# Altium PCB DC2342A-4-LAYOUT-ASCII.PcbDoc (part 1 of 2)
Units mm, origin at the board's own origin, x right, y up, seen from the top; angles counter-clockwise.
Board outline 88.9 x 88.9 mm, 4 copper layers (Comp Side, Layer 2, Layer 3, Solder Side), stack 0.831 mm thick; 86 components, 36 nets, 203 pads, 245 vias.
Unrouted connection lines stored in the file: 89.
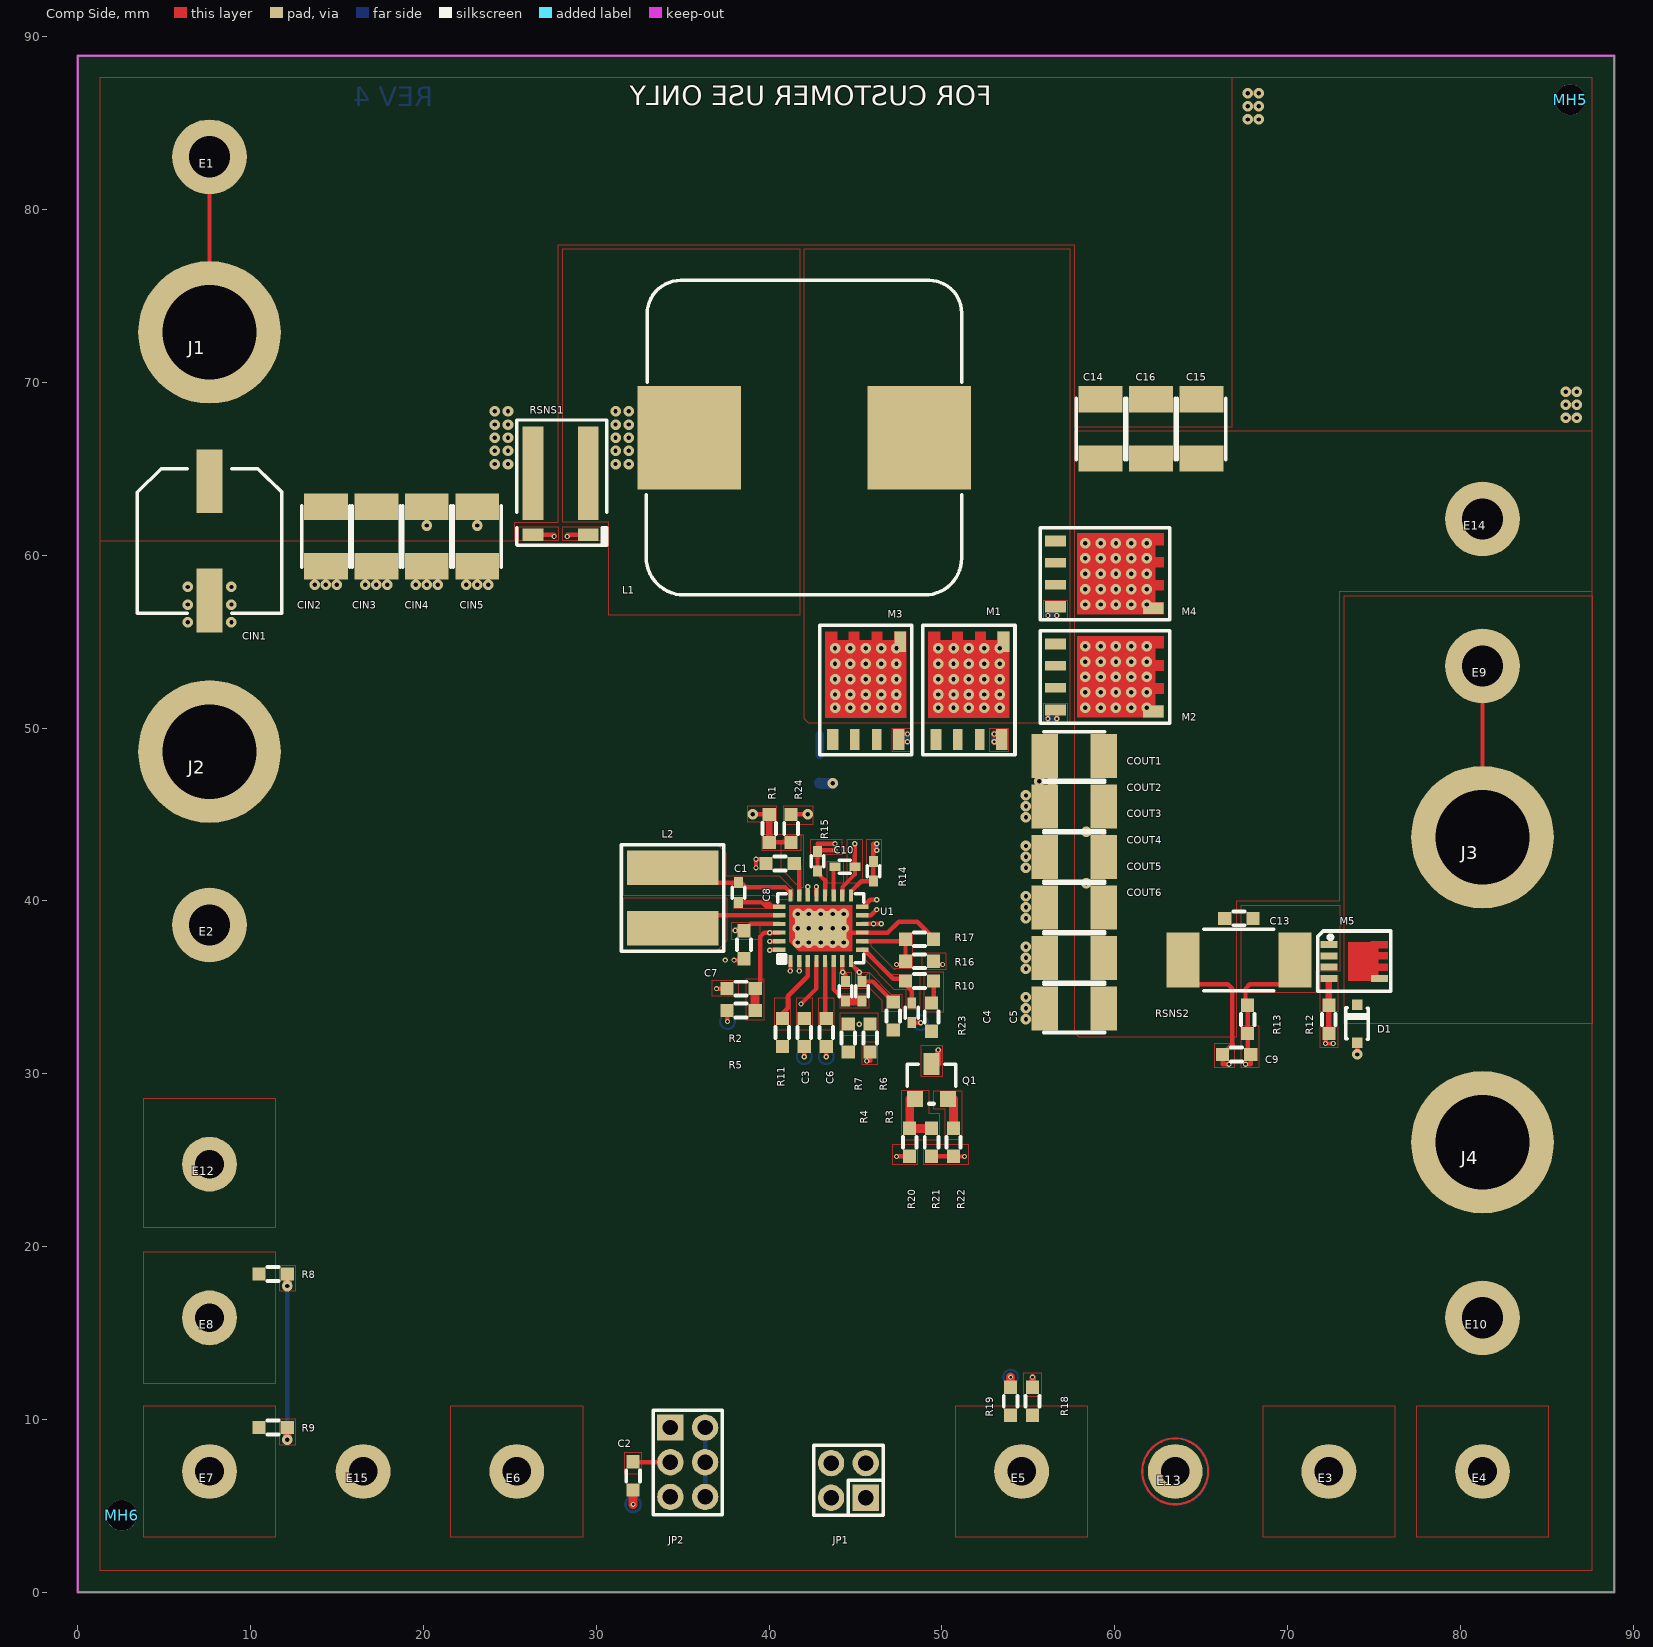
[diagram p0: Comp Side view]
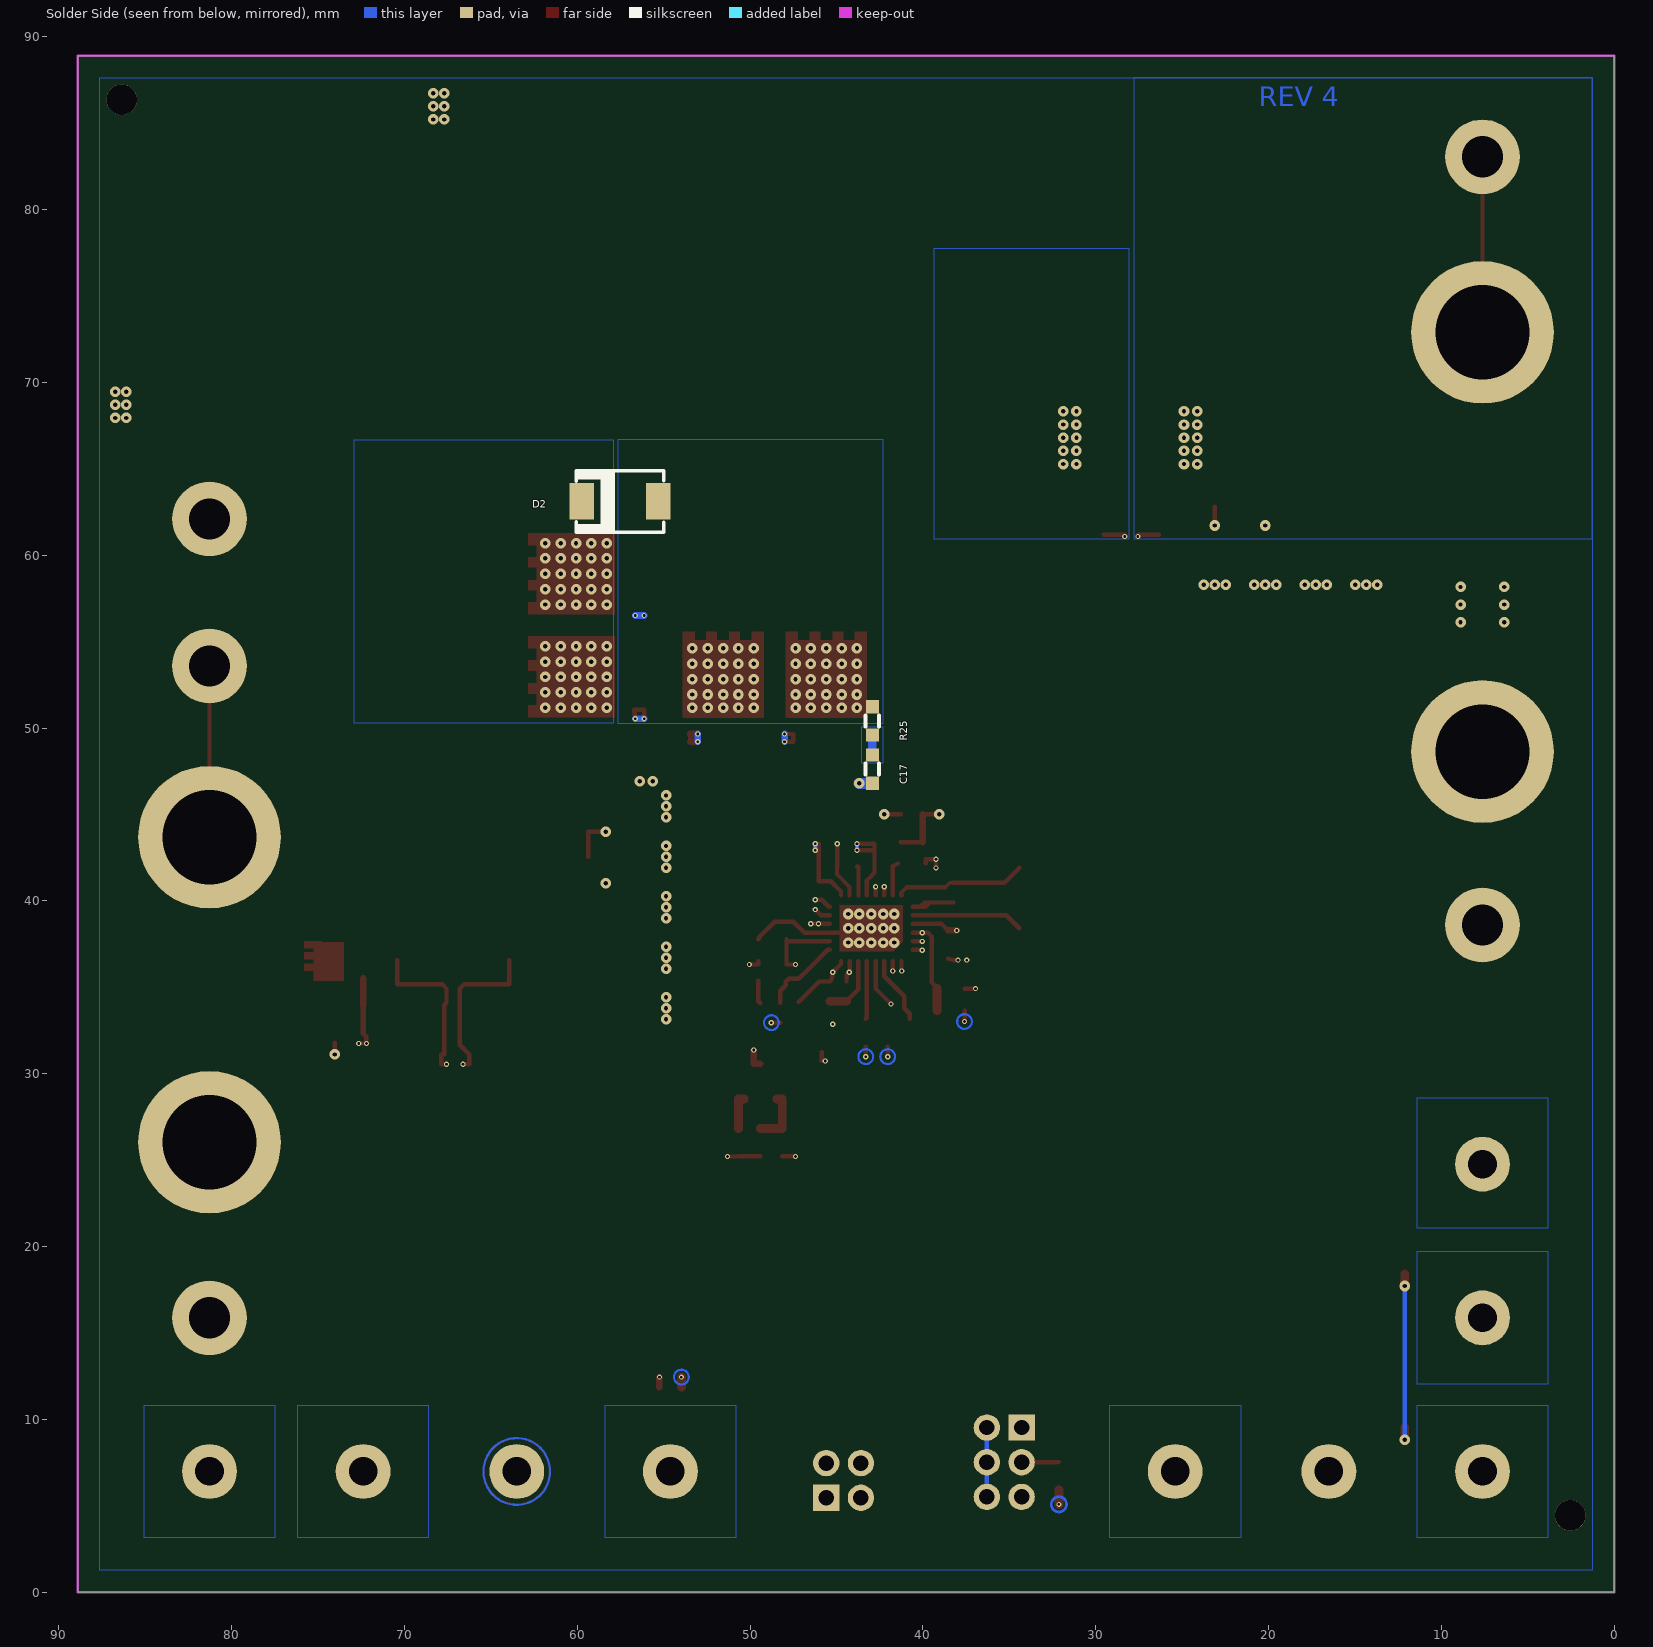
[diagram p1: Solder Side view, seen from below]
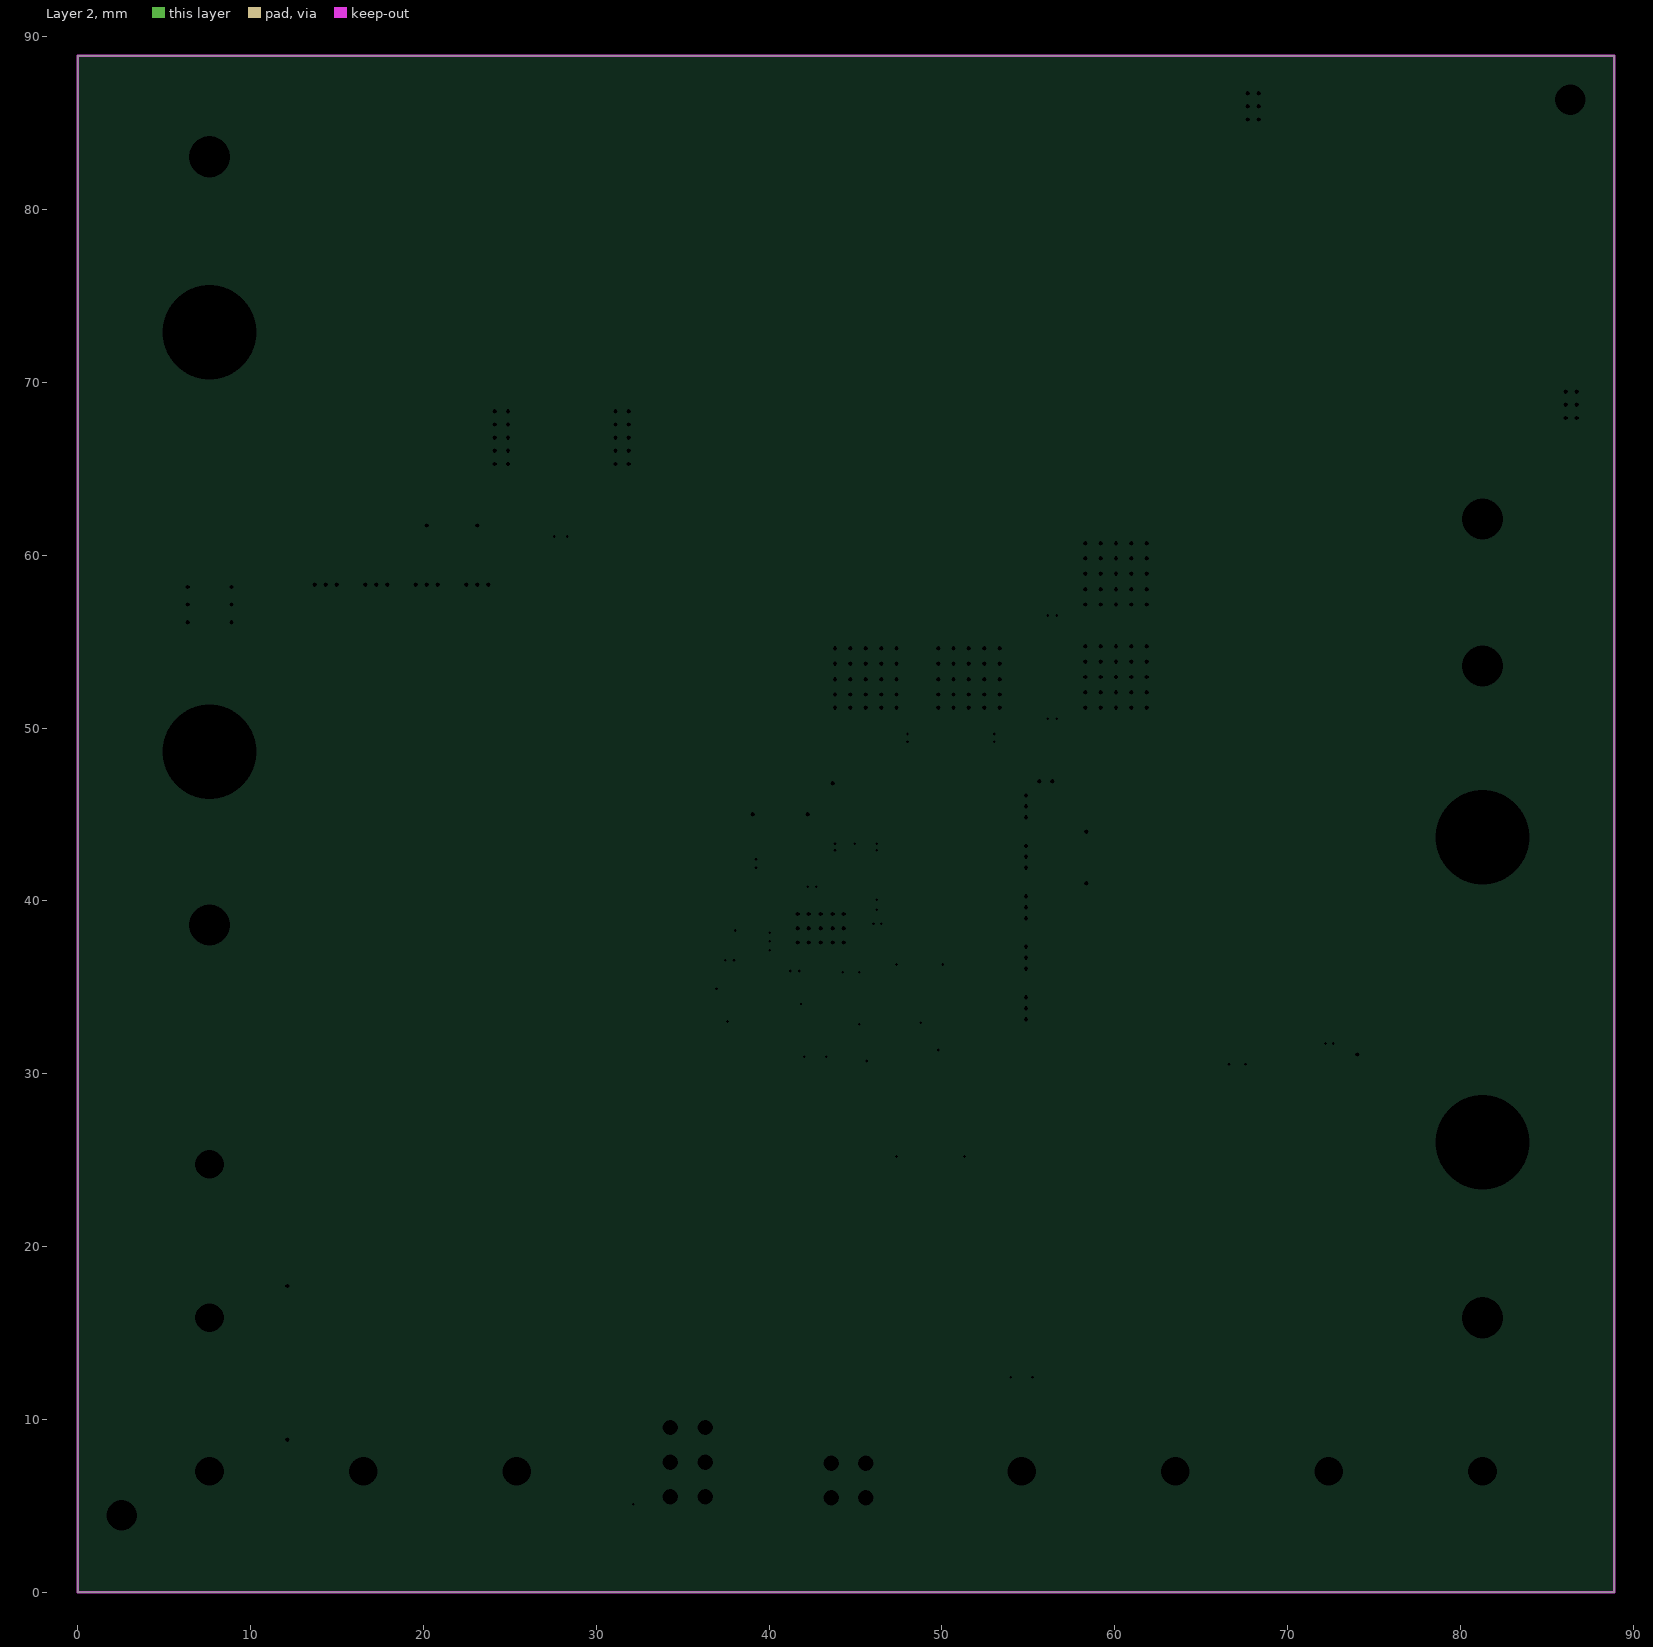
[diagram p2: Layer 2, clearances drawn from the general rule]
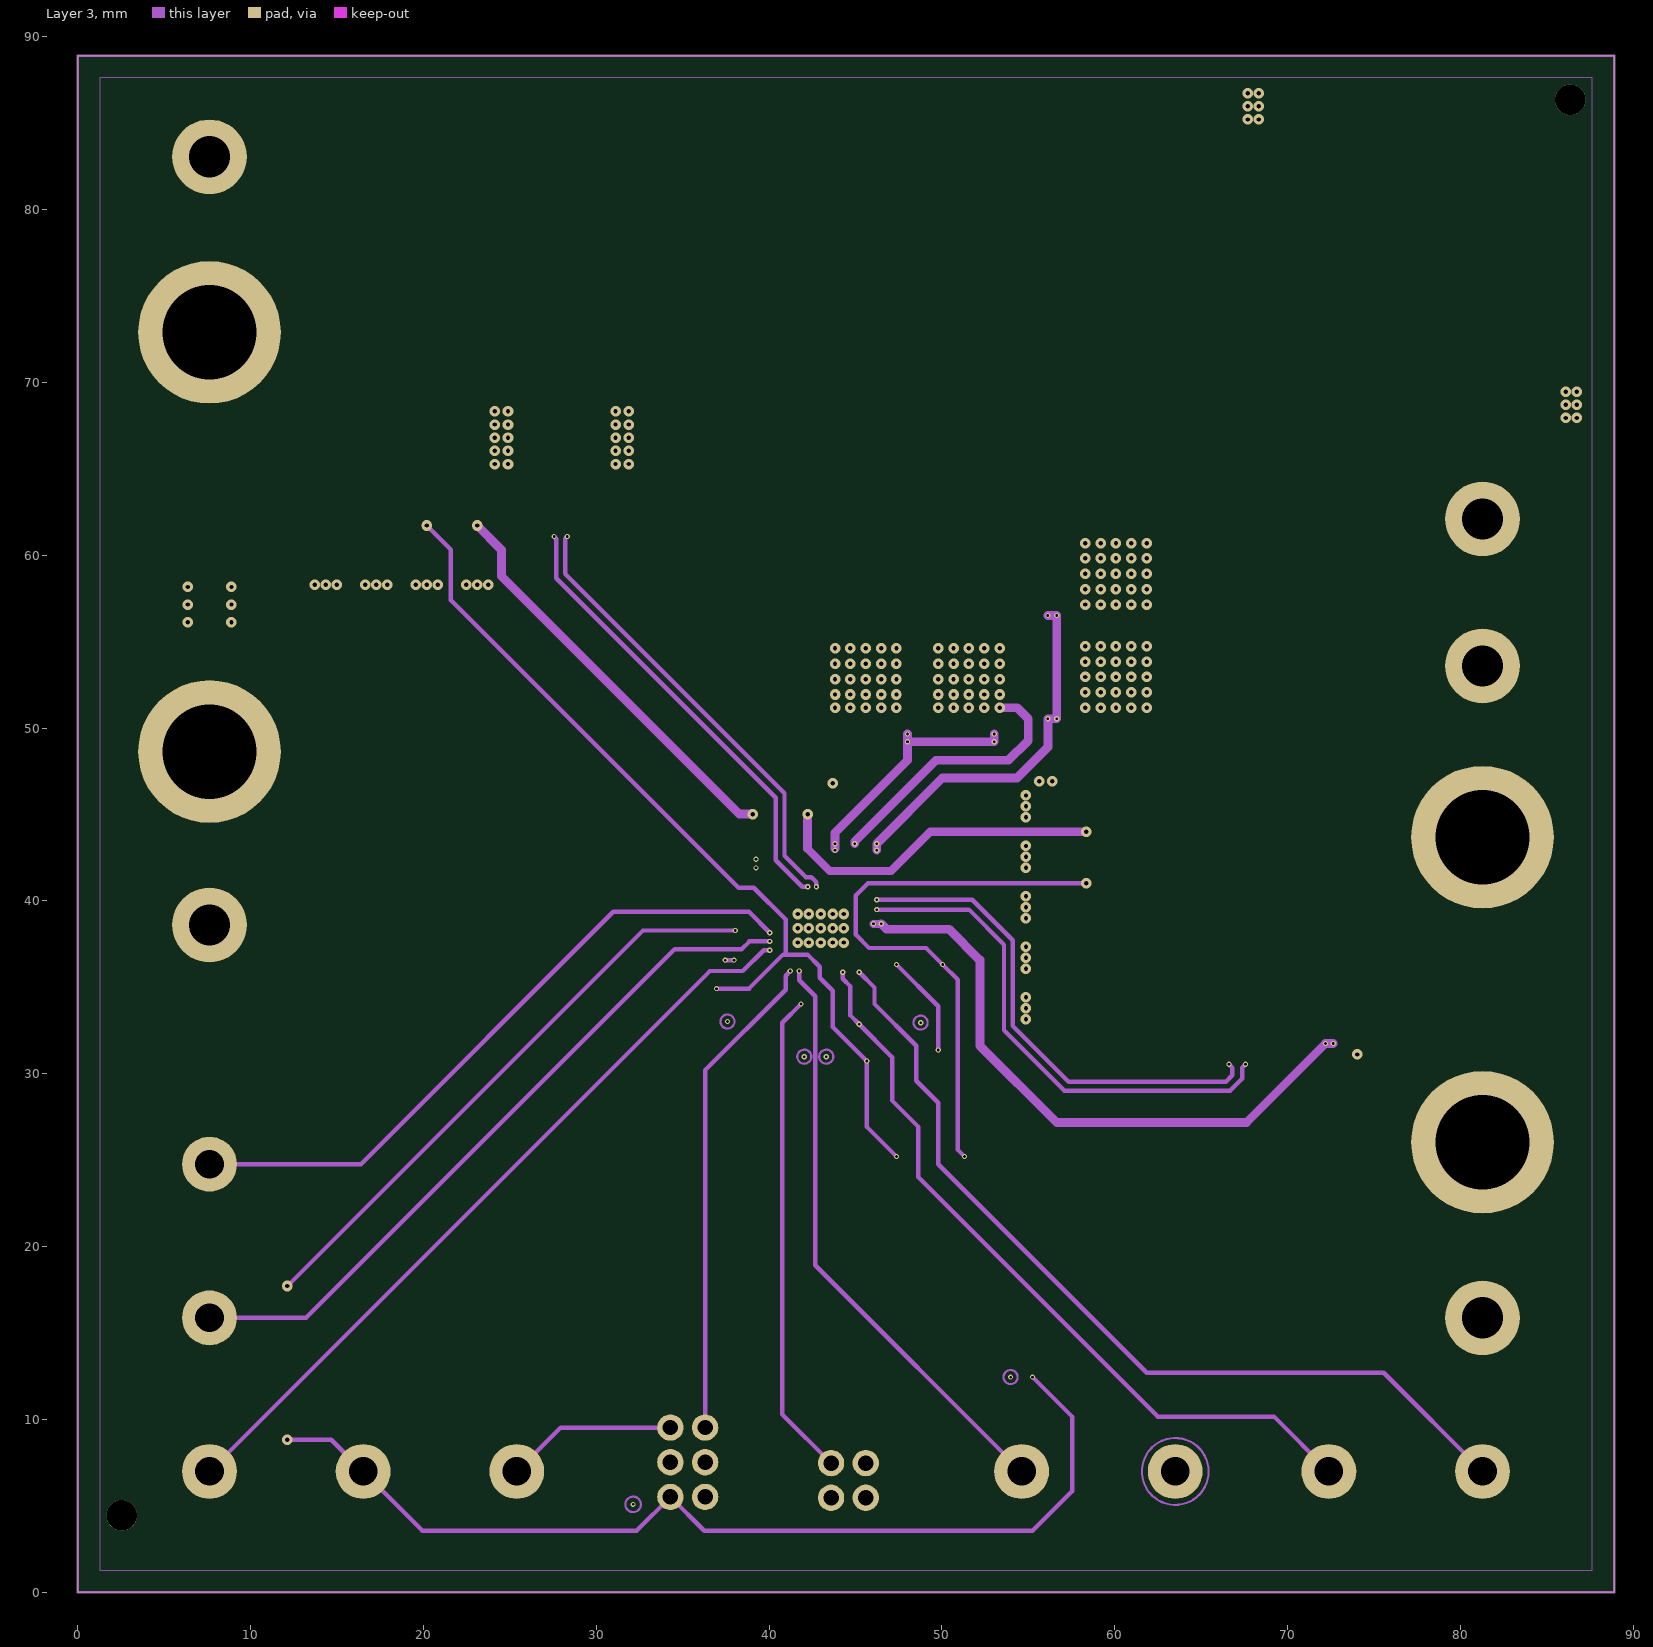
[diagram p3: Layer 3]

## Layer stack, top to bottom
SMask Bottom: solder mask 0.0102, Solder Resist, Dk 3.5
Comp Side: signal copper 0.0254
Dielectric 1: dielectric 0.2032, FR-4, Dk 3.8
Layer 2: plane copper 0.0343
Dielectric2: dielectric 0.254, FR-4, Dk 4.3
Layer 3: signal copper 0.0343
Dielectric3: dielectric 0.254, FR-4, Dk 4.3
Solder Side: signal copper 0.0254
Bottom Solder: solder mask 0.0102, Solder Resist, Dk 3.5

## Board outline
0,0 88.9,0 88.9,88.9 0,88.9

## Design rules (kind name [scope] priority, off if disabled: settings)
Clearance "Clearance - Default - DEFAULT - Via" [IsVia vs IsVia] p1: gap=0.203 ignorepadtopadclearanceinfootprint=FALSE
Clearance "Clearance - Default - DEFAULT- SMD" [IsVia vs IsSMTPin] p2: gap=0.203 ignorepadtopadclearanceinfootprint=FALSE
Clearance "Clearance - Default - DEFAULT - Net" [All] p3: gap=0.254 ignorepadtopadclearanceinfootprint=FALSE except(0.191: Arc-Arc Arc-Track Arc-SMDPad Arc-THPad Arc-Via Arc-Text Track-Track Track-SMDPad Track-THPad Track-Via Track-Text SMDPad-SMDPad SMDPad-THPad SMDPad-Via SMDPad-Text THPad-THPad THPad-Via THPad-Text Via-Via Via-Text Fill-Text Poly-Text Region-Text)
ComponentClearance "ComponentClearance - Default - DEFAULT" [All] p1: gap=0.305 collisioncheckmode=3 verticalgap=0.254 showdistances=FALSE
FanoutControl Fanout_Small [(CompPinCount < 5)] p1: bgadir=Out bgaviamode=Centered fanoutstyle=Auto fanoutdirection=OutThenIn viagrid=0.025 // Fanout_Small (Default Rule)
FanoutControl Fanout_BGA [IsBGA] p2: bgadir=Out bgaviamode=Centered fanoutstyle=Auto fanoutdirection=Alternating viagrid=0.025 // Fanout_BGA (Default Rule)
FanoutControl Fanout_LCC [IsLCC] p4: bgadir=Out bgaviamode=Centered fanoutstyle=Auto fanoutdirection=Alternating viagrid=0.025 // Fanout_LCC (Default Rule)
HoleToHoleClearance "HoleToHoleClearance - Default - DEFAULT" [All] p1: gap=0.127 allowstackedmicrovias=TRUE
Length "Default Length" [All] p1: maxlimit=1270 minlimit=0
MaxMinImpedance "Default Impedance" [All] p1: minimum=50.00 maximum=150.0
ParallelSegment "Default Parallel Segment Same Layer" [All] p1: limit=25.4 gap=5.08
ParallelSegment "Default Parallel Segment Adjasent" [All] p2: limit=25.4 gap=5.08
PlaneConnect "PlaneConnect - Round-oval thru-hole pad from global defaults" [IsPad And OnMultiLayer And (PadShape_MidLayer1 = 'Rounded Rectangle') And (PadXSize_MidLayer1 = PadYSize_MidLayer1) And (Pad_CornerRadius_MidLayer1 = '100%')] p1: planeconnectstyle=Relief reliefexpansion=0.508 reliefentries=4 reliefconductorwidth=0.305 reliefairgap=0.254
PlaneConnect "PlaneConnect - Oval thru-hole pad from global defaults" [IsPad And OnMultiLayer And (PadShape_MidLayer1 = 'Round') And (PadXSize_MidLayer1 <> PadYSize_MidLayer1)] p2: planeconnectstyle=Relief reliefexpansion=0.508 reliefentries=4 reliefconductorwidth=0.305 reliefairgap=0.254
PlaneConnect "Default PlaneConnect" [All] p3: planeconnectstyle=Direct reliefexpansion=0.508 reliefentries=4 reliefconductorwidth=0.305 reliefairgap=0.254
PolygonConnect "PolygonConnect - Comp Side Round-oval thru-hole pad from global defaults" [IsPad And OnMultiLayer And (PadShape_TopLayer = 'Rounded Rectangle') And (PadXSize_TopLayer = PADYSize_TopLayer) And (Pad_CornerRadius_TopLayer = '100%') vs Layer = 'Comp Side'] p1: connectstyle=Relief reliefconductorwidth=0.305 reliefentries=4 polygonreliefangle="90 Angle" airgapwidth=0.254
PolygonConnect "PolygonConnect - Layer 3 Round-oval thru-hole pad from global defaults" [IsPad And OnMultiLayer And (PadShape_MidLayer1 = 'Rounded Rectangle') And (PadXSize_MidLayer1 = PADYSize_MidLayer1) And (Pad_CornerRadius_MidLayer1 = '100%') vs Layer = 'Layer 3'] p2: connectstyle=Relief reliefconductorwidth=0.305 reliefentries=4 polygonreliefangle="90 Angle" airgapwidth=0.254
PolygonConnect "PolygonConnect - Comp Side Oval thru-hole pad from global defaults" [IsPad And OnMultiLayer And (PadShape_TopLayer = 'Round') And (PadXSize_TopLayer <> PADYSize_TopLayer) vs Layer = 'Comp Side'] p3: connectstyle=Relief reliefconductorwidth=0.305 reliefentries=4 polygonreliefangle="90 Angle" airgapwidth=0.254
PolygonConnect "PolygonConnect - Default SMT" [IsSMTPin] p4: connectstyle=Direct reliefconductorwidth=0.305 reliefentries=4 polygonreliefangle="45 Angle" airgapwidth=0.254
PolygonConnect "PolygonConnect - Solder Side Round-oval thru-hole pad from global defaults" [IsPad And OnMultiLayer And (PadShape_BottomLayer = 'Rounded Rectangle') And (PadXSize_BottomLayer = PADYSize_BottomLayer) And (Pad_CornerRadius_BottomLayer = '100%') vs Layer = 'Solder Side'] p5: connectstyle=Relief reliefconductorwidth=0.305 reliefentries=4 polygonreliefangle="90 Angle" airgapwidth=0.254
PolygonConnect "PolygonConnect - Layer 3 Oval thru-hole pad from global defaults" [IsPad And OnMultiLayer And (PadShape_MidLayer1 = 'Round') And (PadXSize_MidLayer1 <> PADYSize_MidLayer1) vs Layer = 'Layer 3'] p6: connectstyle=Relief reliefconductorwidth=0.305 reliefentries=4 polygonreliefangle="90 Angle" airgapwidth=0.254
PolygonConnect "PolygonConnect - Solder Side Oval thru-hole pad from global defaults" [IsPad And OnMultiLayer And (PadShape_BottomLayer = 'Round') And (PadXSize_BottomLayer <> PADYSize_BottomLayer) vs Layer = 'Solder Side'] p7: connectstyle=Relief reliefconductorwidth=0.305 reliefentries=4 polygonreliefangle="90 Angle" airgapwidth=0.254
PolygonConnect "PolygonConnect - Default Pad" [All] p8: connectstyle=Direct reliefconductorwidth=0.305 reliefentries=4 polygonreliefangle="45 Angle" airgapwidth=0.254
RoutingLayers "RoutingLayers - Default - DEFAULT" [All] p1: top layer_v5=TRUE mid layer 1_v5=TRUE bottom layer_v5=TRUE
RoutingPriority "RoutingPriority - Default - DEFAULT" [All] p1: routingpriority=3
RoutingTopology "Default Routing Topology" [All] p1: topology=Shortest
RoutingVias "RoutingVias - Default - DEFAULT" [All] p1: holewidth=0.254 width=0.61 viastyle="Through Hole" minholewidth=0.254 minwidth=0.61 maxholewidth=0.254 maxwidth=0.61
SMDToCorner "SMDToCorner - Default - DEFAULT" [All] p1: distance=80000
SolderMaskExpansion "SolderMaskExpansion from CAM settings" [All] p1: expansion=0.051 istentingtop=FALSE
Width "Default Width" [All] p1: maxlimit=1.27 minlimit=0.152 preferedwidth=0.254
19 further rules are at their usual default settings.

## Components (designator, comment, footprint, x,y, rotation, side; value= is the part's Value field where it differs from the comment)
C1 "0603SS" 0603SS 40.64,42.164 r180 top
C2 "0603SS" 0603SS 32.131,6.731 r270 top
C3 "0603SS" 0603SS 42.037,32.385 r270 top
C4 "0402SMALL" 0402SMALL 48.26,33.528 r270 top
C5 "0603SS" 0603SS 49.403,33.274 r270 top
C6 "0603SS" 0603SS 43.307,32.385 r270 top
C7 "0603SS" 0603SS 38.544,37.465 r270 top
C8 "0402SMALL" 0402SMALL 38.227,40.481 r270 top
C9 "0603SS" 0603SS 67.056,31.115 r0 top
C10 "0402SMALL" 0402SMALL 44.386,41.974 r180 top
C13 "0603SS" 0603SS 67.183,38.989 r0 top
C14 "1210S" 1210S 59.182,67.31 r270 top
C15 "1210S" 1210S 65.024,67.31 r270 top
C16 "1210S" 1210S 62.103,67.31 r270 top
C17 "0603SS" 0603SS 42.926,47.625 r270 bottom
CIN1 "CAP-CE-8X10.2" CAP-CE-8X10.2 7.62,60.833 r270 top
CIN2 "1210S" 1210S 14.351,61.087 r270 top
CIN3 "1210S" 1210S 17.272,61.087 r270 top
CIN4 "1210S" 1210S 20.193,61.087 r270 top
CIN5 "1210S" 1210S 23.114,61.087 r270 top
COUT1 "1210S" 1210S 57.658,48.387 r180 top
COUT2 "1210S" 1210S 57.658,45.466 r180 top
COUT3 "1210S" 1210S 57.658,42.545 r180 top
COUT4 "1210S" 1210S 57.658,39.624 r180 top
COUT5 "1210S" 1210S 57.658,36.703 r180 top
COUT6 "1210S" 1210S 57.658,33.782 r180 top
D1 "SOD-323F" SOD-323F 74.041,32.893 r90 top
D2 "SOD-128" SOD-128 57.531,63.119 r0 bottom
E1 "PAD150-094" PAD150-094 7.62,83.058 r0 top
E2 "PAD150-094" PAD150-094 7.62,38.608 r0 top
E3 "MM$2F$2308" MM$2F$2308 72.39,6.985 r0 top
E4 "MM$2F$2308" MM$2F$2308 81.28,6.985 r0 top
E5 "MM$2F$2308" MM$2F$2308 54.61,6.985 r0 top
E6 "MM$2F$2308" MM$2F$2308 25.4,6.985 r0 top
E7 "MM$2F$2308" MM$2F$2308 7.62,6.985 r0 top
E8 "MM$2F$2308" MM$2F$2308 7.62,15.875 r0 top
E9 "PAD150-094" PAD150-094 81.28,53.594 r0 top
E10 "PAD150-094" PAD150-094 81.28,15.875 r0 top
E12 "MM$2F$2308" MM$2F$2308 7.62,24.765 r0 top
E13 "MM$2F$2308" MM$2F$2308 63.5,6.985 r0 top
E14 "PAD150-094" PAD150-094 81.28,62.103 r0 top
E15 "MM$2F$2308" MM$2F$2308 16.51,6.985 r0 top
J1 "KEY-575-4" KEY-575-4 7.62,72.898 r0 top
J2 "KEY-575-4" KEY-575-4 7.62,48.641 r0 top
J3 "KEY-575-4" KEY-575-4 81.28,43.688 r0 top
J4 "KEY-575-4" KEY-575-4 81.28,26.035 r0 top
JP1 "JP2X2$2F$079" JP2X2$2F$079 45.593,5.461 r90 top
JP2 "JP2X3$2F$079" JP2X3$2F$079 34.29,9.525 r270 top
L1 "IND-7443557" IND-7443557 42.037,66.802 r0 top
L2 "IND-7440894" IND-7440894 34.417,40.164 r180 top
M1 "PG-TDSON-8" PG-TDSON-8 51.562,52.197 r0 top
M2 "PG-TDSON-8" PG-TDSON-8 59.436,52.959 r270 top
M3 "PG-TDSON-8" PG-TDSON-8 45.593,52.197 r0 top
M4 "PG-TDSON-8" PG-TDSON-8 59.436,58.928 r270 top
M5 "POWERPAK-1212-8-S-5P" POWERPAK-1212-8-S-5P 72.39,37.465 r270 top
MH5 "PAD70-70" PAD70-70 86.36,86.36 r0 top
MH6 "PAD70-70" PAD70-70 2.54,4.445 r0 top
Q1 "SOT23" SOT23 49.403,29.527 r0 top
R1 "0603SS" 0603SS 40.005,44.196 r270 top
R2 "0603SS" 0603SS 38.386,34.925 r180 top
R3 "0603SS" 0603SS 45.847,32.067 r270 top
R4 "0603SS" 0603SS 44.577,32.067 r270 top
R5 "0603SS" 0603SS 38.386,33.655 r0 top
R6 "0402SMALL" 0402SMALL 45.371,34.766 r270 top
R7 "0402SMALL" 0402SMALL 44.418,34.766 r270 top
R8 "0603SS" 0603SS 11.303,18.415 r0 top
R9 "0603SS" 0603SS 11.303,9.525 r0 top
R10 "0603SS" 0603SS 48.704,35.369 r180 top
R11 "0603SS" 0603SS 40.767,32.385 r90 top
R12 "0603SS" 0603SS 72.39,33.147 r270 top
R13 "0603SS" 0603SS 67.691,33.147 r90 top
R14 "0402SMALL" 0402SMALL 46.038,41.719 r90 top
R15 "0402SMALL" 0402SMALL 42.799,42.291 r90 top
R16 "0603SS" 0603SS 48.704,36.512 r0 top
R17 "0603SS" 0603SS 48.704,37.782 r180 top
R18 "0603SS" 0603SS 55.245,11.049 r270 top
R19 "0603SS" 0603SS 53.975,11.049 r270 top
R20 "0603SS" 0603SS 48.133,26.035 r90 top
R21 "0603SS" 0603SS 49.403,26.035 r90 top
R22 "0603SS" 0603SS 50.673,26.035 r270 top
R23 "0603SS" 0603SS 47.18,33.337 r90 top
R24 "0603SS" 0603SS 41.275,44.196 r90 top
R25 "0603SS" 0603SS 42.926,50.419 r90 bottom
RSNS1 "1225-4PIN" 1225-4PIN 27.94,64.135 r180 top
RSNS2 "2512" 2512 67.183,36.576 r180 top
U1 "QFN-28-4X5" QFN-28-4X5 42.989,38.417 r0 top

## Footprints (in the part's own frame and the unit in brackets; to place one, negate y for a bottom-side part, rotate by r counter-clockwise, add the part's x,y. Pads: shape width x height; smd on the part's side, far side on the other; paste and mask are expansions set on the pad)
0402SMALL [mil]
  rect 25x20 smd: 1(-22.5,0) 2(22.5,0)
  silkscreen extent -13,-15 13,15
0603SS [mil]
  rect 30x30 smd: 1(-32,0) 2(32,0)
  silkscreen extent -13,-16 13,16
1210S [mil]
  rect 60x100 smd: 1(-67.5,0) 2(67.5,0)
  silkscreen extent -70,-55 70,55
1225-4PIN [mm]
  rect 1.2x5.4 smd: 1(-1.6,-0.61) 3(1.6,-0.61)
  rect 1.2x0.7 smd: 2(-1.6,2.946) 4(1.6,2.946)
  silkscreen extent -2.67,-3.68 2.54,3.56
2512 [mil]
  rect 75x125 smd: 1(-127.5,0) 2(127.5,0)
  silkscreen extent -80,-70 80,70
CAP-CE-8X10.2 [mm]
  rect 3.7x1.5 smd: 1(-3.45,0) 2(3.45,0)
  silkscreen extent -4.18,-4.18 4.18,4.18
IND-7440894 [mm]
  rect 5.3x2 smd: 1(0,1.75) 2(0,-1.75)
  silkscreen extent -2.97,-3.07 2.97,3.07
IND-7443557 [mm]
  rect 6x6 smd: 1(-6.65,0) 2(6.65,0)
  silkscreen extent -9.15,-9.1 9.1,9.1
JP2X2$2F$079 [mil]
  rect 60x60 / inner round 60 / far side rect 60x60 hole 35: 1(0,0)
  round 60 hole 35: 2(0,79) 3(79,0) 4(79,79)
  silkscreen extent -40,-40 120,119
JP2X3$2F$079 [mil]
  rect 60x60 / inner round 60 / far side rect 60x60 hole 35: 1(0,0)
  round 60 hole 35: 2(0,79) 3(79,0) 4(79,79) 5(158,0) 6(158,79)
  silkscreen extent -40,-40 199,119
KEY-575-4 [mil]
  round 325 hole 215: 1(0,0)
MM$2F$2308 [mil]
  round 125 hole 65: 1(0,0)
PAD70-70 [mil]
  round 70 hole 70 unplated: 1(0,0)
PAD150-094 [mil]
  round 170 hole 94: 1(0,0)
PG-TDSON-8 [mm]
  rect 0.65x1.2 smd: 1(-1.905,-2.857) 4(1.905,-2.857)
  rect 0.55x1.2 smd: 2(-0.635,-2.857) 3(0.635,-2.857)
  rect 0.68x1.2 smd: 5(1.995,2.792)
  Comp Side region: -2.349,-1.613 2.337,-1.613 2.337,3.391 1.651,3.391 1.651,2.896 0.96,2.896 0.96,3.391 0.361,3.391 0.361,2.896 -0.37,2.896 -0.37,3.391 -0.97,3.391 -0.97,2.896 -1.664,2.896 -1.664,3.391 -2.349,3.391 -2.349,-1.613
  silkscreen extent -2.67,-3.75 2.67,3.75
POWERPAK-1212-8-S-5P [mil]
  rect 16x39 smd: 1(0,0) 2(25.6,0) 3(51.2,0) 4(76.8,0) 5(76.8,115.2)
  Comp Side region: -5.91,112.6 82.28,112.6 82.28,44.09 -5.91,44.09 -5.91,112.6
  Comp Side region: -8.02,134.73 8.01,134.73 8.01,95.74 -8.02,95.74 -8.02,134.73
  Comp Side region: 17.61,134.7 33.64,134.7 33.64,95.71 17.61,95.71 17.61,134.7
  Comp Side region: 43.2,134.69 59.23,134.69 59.23,95.71 43.2,95.71 43.2,134.69
  silkscreen extent -31,-26 106,141
QFN-28-4X5 [mm]
  rect 0.25x0.7 smd: 1(-1.75,-1.9) 2(-1.25,-1.9) 3(-0.75,-1.9) 4(-0.25,-1.9) 5(0.25,-1.9) 6(0.75,-1.9) 7(1.25,-1.9) 8(1.75,-1.9) 15(1.75,1.9) 16(1.25,1.9) 17(0.75,1.9) 18(0.25,1.9) 19(-0.25,1.9) 20(-0.75,1.9) 21(-1.25,1.9) 22(-1.75,1.9)
  rect 0.7x0.25 smd: 9(2.4,-1.25) 10(2.4,-0.75) 11(2.4,-0.25) 12(2.4,0.25) 13(2.4,0.75) 14(2.4,1.25) 23(-2.4,1.25) 24(-2.4,0.75) 25(-2.4,0.25) 26(-2.4,-0.25) 27(-2.4,-0.75) 28(-2.4,-1.25)
  rect 3x2 smd: 29(0,0)
  Comp Side region: -1.825,1.325 -1.825,-0.779 -1.279,-1.325 1.825,-1.325 1.825,1.325 -1.825,1.325
  silkscreen extent -2.5,-2.03 2.5,2
SOD-128 [mil]
  rect 56x83 smd: 1(87,0) 2(-87,0)
  silkscreen extent -100,-70 100,70
SOD-323F [mm]
  rrect0% 0.6x0.6 smd: 1(1.1,0) 2(-1.1,0)
  silkscreen extent -0.89,-0.64 0.91,0.66
SOT23 [mil]
  rect 36x36 smd: 1(-37.5,-39) 2(37.5,-39)
  rect 36x50 smd: 3(0,41)
  silkscreen extent -55,-50 55,40

## Via types
v1: diameter 0.61, hole 0.254, Comp Side to Solder Side, 192 vias
v2: diameter 0.305, hole 0.152, Comp Side to Solder Side, 53 vias

## Nets (pads, with @x,y where several pads share a name; then routed paths per layer and width w, separated by ;. In a path a pad name is that pad's centre, name@x,y a point inside that pad or via, vN(x,y) a via of type N, cw(c..) or ccw(c..) an arc to the next point about the centre after c; other vN are vias at no path point)
EN/UVLO: E12.1 R2.1 R5.2 U1.26 | length 44.6
  Comp Side w0.254: R2.1@39.186,34.925 39.188,34.977 39.497,35.286 39.497,37.941 39.723,38.168 v2@40.069,38.168 ; v2(40.043,38.163) v2@40.069,38.168 ; U1.26@40.589,38.168 v2@40.069,38.168
  Comp Side w0.508: R5.2@39.186,33.655 R2.1@39.186,34.925
  Layer 3 w0.254: E12.1@7.62,24.765 16.383,24.765 30.988,39.37 38.837,39.37 v2(40.043,38.163)
GND: C1.2 C2.2 C3.2 C4.2 C5.2 C6.2 C7.2 C17.2 CIN1.2 CIN2.2 CIN3.2 CIN4.2 CIN5.2 COUT1.2 COUT2.2 COUT3.2 COUT4.2 COUT5.2 COUT6.2 D1.2 E2.1 E10.1 E13.1 J2.1 J4.1 JP1.1 JP1.2 JP1.3 M1.1 M1.2 M1.3 M3.1 M3.2 M3.3 R4.2 R5.1 R11.1 R17.1 R19.1 R23.1 U1.11 U1.29 | length 13.7
  Comp Side w0.254: R5.1@37.573,33.655 37.573,33.02 v2(37.592,33.02) ; v2(37.973,36.576) 38.214,36.576 C7.2@38.544,36.652 ; v2(39.243,41.91) v2(39.243,42.418) 39.827,42.418 C1.2@39.827,42.164 ; v2(42.037,30.988) C3.2@42.037,31.572 ; v2(43.307,30.988) C6.2@43.307,31.572 ; v1(44.323,38.417) 44.486,38.417 44.736,38.168 U1.11@45.39,38.168 46.867,38.168 47.498,38.798 48.578,38.798 49.466,37.91 49.466,37.833 R17.1@49.517,37.782 ; C4.2@48.26,32.956 v2(48.768,32.956) ; v1(74.041,31.115) D1.2@74.041,31.793
  Comp Side w0.508: v2(32.131,5.08) C2.2@32.131,5.918 ; R19.1@53.975,11.862 v2(53.975,12.446)
  Layer 3 w0.254: v2(37.465,36.576) v2(37.973,36.576)
  Solder Side w0.635: C17.2@42.926,46.812 42.939,46.799 v1(43.688,46.799)
  other v1: 54.864,33.147 54.864,33.782 54.864,34.417 54.864,36.068 54.864,36.703 54.864,37.338 41.656,37.592 42.291,37.592 42.989,37.592 43.688,37.592 44.323,37.592 41.656,38.417 42.291,38.417 42.989,38.417 43.688,38.417 54.864,38.989 41.656,39.243 42.291,39.243 42.989,39.243 43.688,39.243 44.323,39.243 54.864,39.624 54.864,40.259 54.864,41.91 54.864,42.545 54.864,43.18 54.864,44.831 54.864,45.466 54.864,46.101 55.626,46.926 56.388,46.926 6.35,56.134 8.89,56.134 6.35,57.15 8.89,57.15 6.35,58.166 8.89,58.166 13.716,58.293 14.351,58.293 14.986,58.293 16.637,58.293 17.272,58.293 17.907,58.293 19.558,58.293 20.193,58.293 20.828,58.293 22.479,58.293 23.114,58.293 23.749,58.293 86.106,67.945 86.741,67.945 86.106,68.707 86.741,68.707 86.106,69.469 86.741,69.469 67.691,85.217 68.326,85.217 67.691,85.979 68.326,85.979 67.691,86.741 68.326,86.741
INTVCC: C7.1 E15.1 JP2.5 R8.2 R9.2 R18.1 U1.25 | length 105.7
  Comp Side w0.254: C7.1@38.544,38.291 38.921,38.667 U1.25@40.589,38.667
  Comp Side w0.381: v2(38.036,38.291) C7.1@38.544,38.291 ; R18.1@55.245,11.862 v2(55.245,12.446)
  Comp Side w0.508: R9.2@12.116,9.525 12.116,8.839 v1(12.128,8.826) ; R8.2@12.116,18.415 v1(12.128,17.716)
  Layer 3 w0.254: v1(12.128,8.826) 14.668,8.826 E15.1@16.51,6.985 19.939,3.556 32.334,3.556 JP2.5@34.29,5.512 36.246,3.556 55.245,3.556 57.531,5.842 57.531,10.16 v2(55.245,12.446) ; v1(12.128,17.716) 32.703,38.291 v2(38.036,38.291)
  Solder Side w0.254: v1(12.128,8.826) v1(12.128,17.716)
N17508735: R11.2 U1.3 | length 3.9
  Comp Side w0.254: R11.2@40.767,33.185 40.767,33.465 41.084,33.782 41.084,34.48 42.24,35.635 U1.3@42.239,36.518
N17513891: R6.2 R7.2 U1.6 | length 3.6
  Comp Side w0.254: U1.6@43.74,36.518 43.74,34.873 R7.2@44.418,34.195
  Comp Side w0.508: R7.2@44.418,34.195 R6.2@45.371,34.195
N17513992: E3.1 R3.1 R4.1 R7.1 U1.7 | length 45.7
  Comp Side w0.254: U1.7@44.24,36.518 44.24,35.897 v2(44.259,35.877) 44.41,35.727 R7.1@44.418,35.338
  Layer 3 w0.254: v2(44.259,35.877) 44.259,35.496 44.704,35.052 44.704,33.369 v2(45.212,32.861) 47.117,30.956 47.117,28.448 48.641,26.924 48.641,24.003 62.484,10.16 69.215,10.16 E3.1@72.39,6.985
N17514220: E4.1 R6.1 R23.2 U1.8 | length 55.6
  Comp Side w0.254: U1.8@44.739,36.518 44.74,36.35 v2(45.212,35.877) 45.257,35.56 R6.1@45.371,35.338 45.993,35.338 R23.2@47.18,34.15
  Layer 3 w0.254: v2(45.212,35.877) 46.101,34.989 46.101,34.036 48.514,31.623 48.514,29.591 49.784,28.321 49.784,24.765 61.849,12.7 75.565,12.7 E4.1@81.28,6.985
N17516446: E5.1 R18.2 R19.2 U1.2 | length 34.9
  Comp Side w0.254: v2(41.739,35.941) U1.2@41.739,36.518
  Layer 3 w0.254: v2(41.739,35.941) 41.739,35.408 42.672,34.48 42.672,18.923 E5.1@54.61,6.985
N17517750: E6.1 JP2.1 | length 9.9
  Layer 3 w0.254: E6.1@25.4,6.985 27.94,9.525 JP2.1@34.29,9.525
N17524747: E8.1 R8.1 U1.27 | length 42
  Comp Side w0.203: v2(40.043,37.655) v2@40.095,37.656
  Comp Side w0.254: v2@40.095,37.656 40.107,37.667 U1.27@40.589,37.667
  Layer 3 w0.254: E8.1@7.62,15.875 13.208,15.875 34.544,37.211 38.417,37.211 38.862,37.655 v2(40.043,37.655)
N17526210: E7.1 R9.1 U1.28 | length 45.5
  Comp Side w0.203: v2(40.043,37.148) v2@40.112,37.16
  Comp Side w0.254: v2@40.112,37.16 40.12,37.167 U1.28@40.589,37.167
  Layer 3 w0.254: E7.1@7.62,6.985 36.576,35.941 38.481,35.941 39.688,37.148 v2(40.043,37.148)
N17528963: C4.1 R10.2 U1.9 | length 4.8
  Comp Side w0.254: U1.9@45.39,37.167 45.51,37.167 46.641,36.036 47.18,35.496 47.765,35.496 R10.2@47.808,35.453 ; R10.2@47.892,35.369 R10.2@47.808,35.453 ; C4.1@48.26,34.099 48.26,34.798 47.942,35.115 47.942,35.319 R10.2@47.808,35.453
N17530568: C6.1 U1.5 | length 3.4
  Comp Side w0.254: U1.5@43.239,36.518 43.239,33.253 C6.1@43.307,33.185
N17541944: L1.1 RSNS1.1
  other v1: 31.115,65.278 31.877,65.278 31.115,66.04 31.877,66.04 31.115,66.802 31.877,66.802 31.115,67.564 31.877,67.564 31.115,68.326 31.877,68.326
N17545932: C10.1 D2.2 L1.2 M1.5 M2.1 M2.2 M2.3 M3.5 M4.1 M4.2 M4.3 R25.2 U1.16 | length 19.1
  Comp Side w0.229: U1.16@44.24,40.317 44.24,40.811 44.958,41.529 C10.1@44.958,41.974
  Comp Side w0.254: C10.1@44.958,41.974 v2(44.958,43.307)
  Layer 3 w0.508: v2(44.958,43.307) 44.958,43.434 49.657,48.133 53.848,48.133 54.991,49.276 54.991,50.546 54.356,51.181 v1(53.34,51.181)
  other v1: 43.815,51.181 44.704,51.181 45.593,51.181 46.482,51.181 47.371,51.181 49.784,51.181 50.673,51.181 51.562,51.181 52.451,51.181 43.815,51.943 44.704,51.943 45.593,51.943 46.482,51.943 47.371,51.943 49.784,51.943 50.673,51.943 51.562,51.943 52.451,51.943 53.34,51.943 43.815,52.832 44.704,52.832 45.593,52.832 46.482,52.832 47.371,52.832 49.784,52.832 50.673,52.832 51.562,52.832 52.451,52.832 53.34,52.832 43.815,53.721 44.704,53.721 45.593,53.721 46.482,53.721 47.371,53.721 49.784,53.721 50.673,53.721 51.562,53.721 52.451,53.721 53.34,53.721 43.815,54.61 44.704,54.61 45.593,54.61 46.482,54.61 47.371,54.61 49.784,54.61 50.673,54.61 51.562,54.61 52.451,54.61 53.34,54.61
N17551482: C10.2 U1.17 | length 1.7
  Comp Side w0.229: U1.17@43.74,40.317 C10.2@43.74,41.974
  Comp Side w0.254: C10.2@43.74,41.974 C10.2@43.815,41.974
N17553131: M2.4 M4.4 R14.1 R14.2 U1.15 | length 28.6
  Comp Side w0.254: U1.15@44.739,40.317 44.74,40.548 45.326,41.135 R14.1@46.012,41.135 ; R14.1@46.038,41.148 R14.1@46.012,41.135 ; v2(46.228,42.926) 46.038,42.926 ; v2(46.228,43.307) 46.038,43.307 46.038,42.926 ; v2(56.134,50.546) 56.134,51.054 M2.4@56.578,51.054 56.706,51.054 v2(56.642,50.546) ; R14.1@46.012,41.135 46.012,41.186 46.038,41.212 R14.2@46.038,42.291 46.038,42.926
  Layer 3 w0.508: v2(46.228,42.926) v2(46.228,43.307) 50.038,47.117 54.356,47.117 56.134,48.895 v2(56.134,50.546) v2(56.642,50.546) v2(56.642,56.515) v2(56.134,56.515)
  Solder Side w0.254: v2(46.228,42.926) v2(46.228,43.307)
  Solder Side w0.381: v2(56.134,50.546) v2(56.642,50.546) ; v2(56.134,56.515) v2(56.642,56.515)
N17555485: Q1.3 R16.1 R17.2 U1.10 | length 11.7
  Comp Side w0.254: U1.10@45.39,37.667 47.307,37.667 47.892,37.667 R17.2@47.892,37.782 R16.1@47.892,36.512 47.892,36.322 v2(47.371,36.322)
  Comp Side w0.381: Q1.3@49.403,30.569 49.784,30.569 v2(49.784,31.369)
  Layer 3 w0.254: v2(47.371,36.322) 49.784,33.909 v2(49.784,31.369)
N17560526: C9.2 C13.2 M5.1 M5.2 M5.3 R13.1 R13.2 RSNS2.1 U1.13 | length 39.8
  Comp Side w0.254: U1.13@45.39,39.168 45.899,39.168 v2(46.228,39.497) ; v2(67.564,30.543) 67.869,30.543 C9.2@67.869,31.115 67.691,31.115 R13.1@67.691,32.334 R13.2@67.691,33.96 67.667,34.015 67.564,34.117 67.564,34.925 67.818,35.179 70.421,35.179 RSNS2.1@70.421,36.576
  Layer 3 w0.254: v2(46.228,39.497) 51.562,39.497 53.594,37.465 53.594,32.512 57.087,29.019 66.675,29.019 67.373,29.718 67.373,30.353 v2(67.564,30.543)
N17570801: M1.4 M3.4 R15.1 R15.2 U1.18 | length 23.5
  Comp Side w0.254: U1.18@43.239,40.317 43.239,41.185 42.799,41.626 R15.1@42.799,41.719 R15.2@42.799,42.862 ; v2(43.815,42.926) 42.97,42.926 42.906,42.862 R15.2@42.799,42.862 ; v2(43.815,43.307) 42.799,43.307 R15.2@42.799,42.862 ; v2(48.006,49.212) 47.498,49.212 M3.4@47.498,49.34 47.498,49.657 v2(48.006,49.657) ; M1.4@53.467,49.34 53.467,49.212 M1.4@53.467,49.657
  Comp Side w0.381: v2(53.023,49.212) M1.4@53.467,49.212 ; v2(53.023,49.657) M1.4@53.467,49.657
  Layer 3 w0.254: v2(43.815,42.926) 43.815,43.053 43.815,43.078
  Layer 3 w0.305: v2(43.815,42.926) v2@43.815,43.028
  Layer 3 w0.508: v2@43.815,43.028 v2@43.815,43.053 ; 43.815,43.078 v2(43.815,43.307) 43.815,43.942 48.006,48.133 v2(48.006,49.212) ; v2(48.006,49.657) v2(48.006,49.212) ; v2(53.023,49.657) v2(53.023,49.212) v2(48.006,49.212)
  Solder Side w0.254: v2(43.815,42.926) v2(43.815,43.307)
  Solder Side w0.381: v2(48.006,49.212) v2(48.006,49.657) ; v2(53.023,49.212) v2(53.023,49.657)
N17573845: M5.4 R12.1 R12.2 U1.12 | length 41.6
  Comp Side w0.254: U1.12@45.39,38.667 45.906,38.667 v2(46.038,38.672) v2(46.482,38.672) ; R12.2@72.39,32.334 72.2,32.144 v2@72.2,31.813 ; v2(72.644,31.75) v2(72.2,31.75) ; v2(72.2,31.75) 72.187,31.75 72.187,31.813 v2@72.2,31.813 ; v2(72.2,31.75) v2@72.2,31.813
  Comp Side w0.305: R12.2@72.39,32.334 R12.1@72.39,33.96
  Comp Side w0.381: R12.1@72.39,33.96 M5.4@72.39,35.514
  Layer 3 w0.457: v2(46.038,38.672) v2(46.482,38.672)
  Layer 3 w0.508: v2(46.482,38.672) 46.799,38.354 50.419,38.354 52.197,36.576 52.197,31.623 56.642,27.178 67.627,27.178 v2(72.2,31.75) v2(72.644,31.75)
N17575671: D1.1 E9.1 J3.1 M5.5 | length 9.9
  Comp Side w0.254: J3.1@81.28,43.688 E9.1@81.28,53.594
N17581235: L2.1 U1.24 | length 6.5
  Comp Side w0.254: L2.1@34.417,38.414 34.429,38.414 35.183,39.168 U1.24@40.589,39.168
N17581448: C8.1 L2.2 U1.22 | length 7.6
  Comp Side w0.203: C8.1@38.227,41.053 38.449,41.053 38.703,40.799
  Comp Side w0.254: L2.2@34.417,41.914 35.278,41.053 C8.1@38.227,41.053 ; 38.703,40.799 40.926,40.799 41.243,40.481 41.243,40.321 U1.22@41.24,40.317 U1.22@41.234,40.322
N17582960: C8.2 U1.23 | length 3.5
  Comp Side w0.254: C8.2@38.227,39.91 39.605,39.91 ; 39.605,39.91 39.91,39.91 40.152,39.668 U1.23@40.589,39.668 39.847,39.668 39.605,39.91
N17687401: Q1.1 R20.2 R21.2 | length 3.3
  Comp Side w0.508: Q1.1@48.45,28.537 48.133,28.537 48.133,26.835 R21.2@49.403,26.835
N17786879: C2.1 JP2.3 | length 2.2
  Comp Side w0.254: C2.1@32.131,7.531 32.271,7.518 JP2.3@34.29,7.518
N17787734: JP2.2 JP2.4 JP2.6 U1.1 | length 33.1
  Comp Side w0.254: v2(41.224,35.941) 41.24,35.941 U1.1@41.24,36.518
  Layer 3 w0.254: JP2.2@36.297,9.525 36.297,30.201 40.957,34.861 40.957,35.674 v2(41.224,35.941)
  Solder Side w0.254: JP2.6@36.297,5.512 JP2.4@36.297,7.518 JP2.2@36.297,9.525
N17802504: RSNS1.2 U1.19 | length 28.4
  Comp Side w0.254: v2(28.321,61.087) 28.321,61.189 RSNS1.2@29.54,61.189 ; v2(42.738,40.825) 42.74,40.825 U1.19@42.74,40.317
  Layer 3 w0.254: v2(28.321,61.087) 28.194,60.96 28.194,58.928 40.894,46.228 40.894,42.608 42.126,41.377 42.442,41.377 42.738,41.084 v2(42.738,40.825)
N17802509: RSNS1.4 U1.20 | length 28.4
  Comp Side w0.254: RSNS1.4@26.34,61.189 27.559,61.189 v2(27.559,61.087) ; U1.20@42.239,40.317 v2(42.24,40.823)
  Layer 3 w0.254: v2(27.559,61.087) 27.686,60.96 27.686,58.674 40.386,45.974 40.386,42.354 41.917,40.823 v2(42.24,40.823)
N17821194: C17.1 R25.1 | length 1.2
  Solder Side w0.508: C17.1@42.926,48.438 R25.1@42.926,49.606
N176855280: Q1.2 R22.1 | length 2
  Comp Side w0.508: Q1.2@50.355,28.537 50.673,28.537 R22.1@50.673,26.835
N178073360: C5.1 R10.1 | length 1.3
  Comp Side w0.254: C5.1@49.403,34.087 49.517,34.201 R10.1@49.517,35.369
OUT: C9.1 C13.1 C14.2 C15.2 C16.2 COUT1.1 COUT2.1 COUT3.1 COUT4.1 COUT5.1 COUT6.1 D2.1 E14.1 M2.5 M4.5 R16.2 R21.1 R22.2 R24.2 RSNS2.2 U1.14 | length 98
  Comp Side w0.254: R24.2@41.275,45.009 42.227,45.009 v1(42.227,45.021) ; U1.14@45.39,39.668 45.446,39.668 45.847,40.069 v2(46.228,40.069) ; R21.1@49.403,25.222 R22.2@50.673,25.222 50.686,25.209 v2(51.308,25.209) ; R16.2@49.517,36.512 49.517,36.322 v2(50.038,36.322) ; v1(58.356,44.005) 59.372,44.005 COUT3.1@59.372,42.545 ; RSNS2.2@63.944,36.576 63.944,35.179 66.548,35.179 66.802,34.925 66.802,31.674 C9.1@66.243,31.115 66.243,30.543 v2(66.611,30.543)
  Layer 3 w0.254: v2(46.228,40.069) 51.752,40.069 54.102,37.719 54.102,32.766 57.34,29.527 66.421,29.527 66.802,29.909 66.802,30.353 v2(66.611,30.543) ; v2(51.308,25.209) 50.927,25.59 50.927,35.433 v2(50.038,36.322) 49.085,37.274 45.783,37.274 45.021,38.036 45.021,40.322 45.72,41.021 v1(58.356,41.021)
  Layer 3 w0.457: 42.227,43.015 43.51,41.732 47.066,41.732
  Layer 3 w0.483: 47.066,41.732 49.34,44.005
  Layer 3 w0.508: 42.227,43.015 v1(42.227,45.021) ; 49.34,44.005 v1(58.356,44.005)
  other v1: 58.293,51.181 59.182,51.181 60.071,51.181 60.96,51.181 61.849,51.181 58.293,52.07 59.182,52.07 60.071,52.07 60.96,52.07 61.849,52.07 58.293,52.959 59.182,52.959 60.071,52.959 60.96,52.959 61.849,52.959 58.293,53.848 59.182,53.848 60.071,53.848 60.96,53.848 61.849,53.848 58.293,54.737 59.182,54.737 60.071,54.737 60.96,54.737 61.849,54.737 58.293,57.15 59.182,57.15 60.071,57.15 60.96,57.15 61.849,57.15 58.293,58.039 59.182,58.039 60.071,58.039 60.96,58.039 61.849,58.039 58.293,58.928 59.182,58.928 60.071,58.928 60.96,58.928 61.849,58.928 58.293,59.817 59.182,59.817 60.071,59.817 60.96,59.817 61.849,59.817 58.293,60.706 59.182,60.706 60.071,60.706 60.96,60.706 61.849,60.706
PVIN: C1.1 C14.1 C15.1 C16.1 CIN1.1 CIN2.1 CIN3.1 CIN4.1 CIN5.1 E1.1 J1.1 R1.1 R1.2 R2.2 R3.2 R20.1 R24.1 RSNS1.3 U1.21 | length 96.8
  Comp Side w0.254: J1.1@7.62,72.898 E1.1@7.62,83.058 ; v1(23.114,61.722) CIN5.1@23.114,62.801 ; v2(36.957,34.925) R2.2@37.573,34.925 ; v1(39.052,45.021) 39.306,45.009 R1.1@40.005,45.009 ; R1.2@40.005,43.383 R24.1@41.275,43.383 ; C1.1@41.453,42.164 41.739,42.004 U1.21@41.739,40.317 ; v2(45.657,30.734) 45.847,30.734 R3.2@45.847,31.255 ; v2(47.371,25.209) 47.371,25.222 R20.1@48.133,25.222
  Comp Side w0.381: R1.2@40.005,43.383 R1.1@40.005,45.009
  Layer 3 w0.254: v1(20.193,61.722) 21.59,60.325 21.59,57.404 38.227,40.767 39.116,40.767 40.957,38.925 40.957,36.893 ; v2(36.957,34.925) 38.842,34.925 40.81,36.893 40.957,36.893 ; v2(47.371,25.209) 45.659,26.922 45.659,30.686 v2(45.657,30.734) 43.688,32.703 43.688,34.798 42.926,35.56 42.926,36.195 42.227,36.893 40.957,36.893
  Layer 3 w0.508: v1(23.114,61.722) 24.511,60.325 24.511,58.801 38.291,45.021 v1(39.052,45.021)
  other v1: 24.13,65.278 24.892,65.278 24.13,66.04 24.892,66.04 24.13,66.802 24.892,66.802 24.13,67.564 24.892,67.564 24.13,68.326 24.892,68.326
SSFM: C3.1 JP1.4 U1.4 | length 31
  Comp Side w0.254: v2(41.846,34.036) 42.74,34.929 U1.4@42.74,36.518
  Layer 3 w0.254: v2(41.846,34.036) 40.767,32.956 40.767,10.287 JP1.4@43.586,7.468
pads on no net: MH5.1 MH6.1